# EAGLE board DeviceDIn24 (EAGLE 5.00)
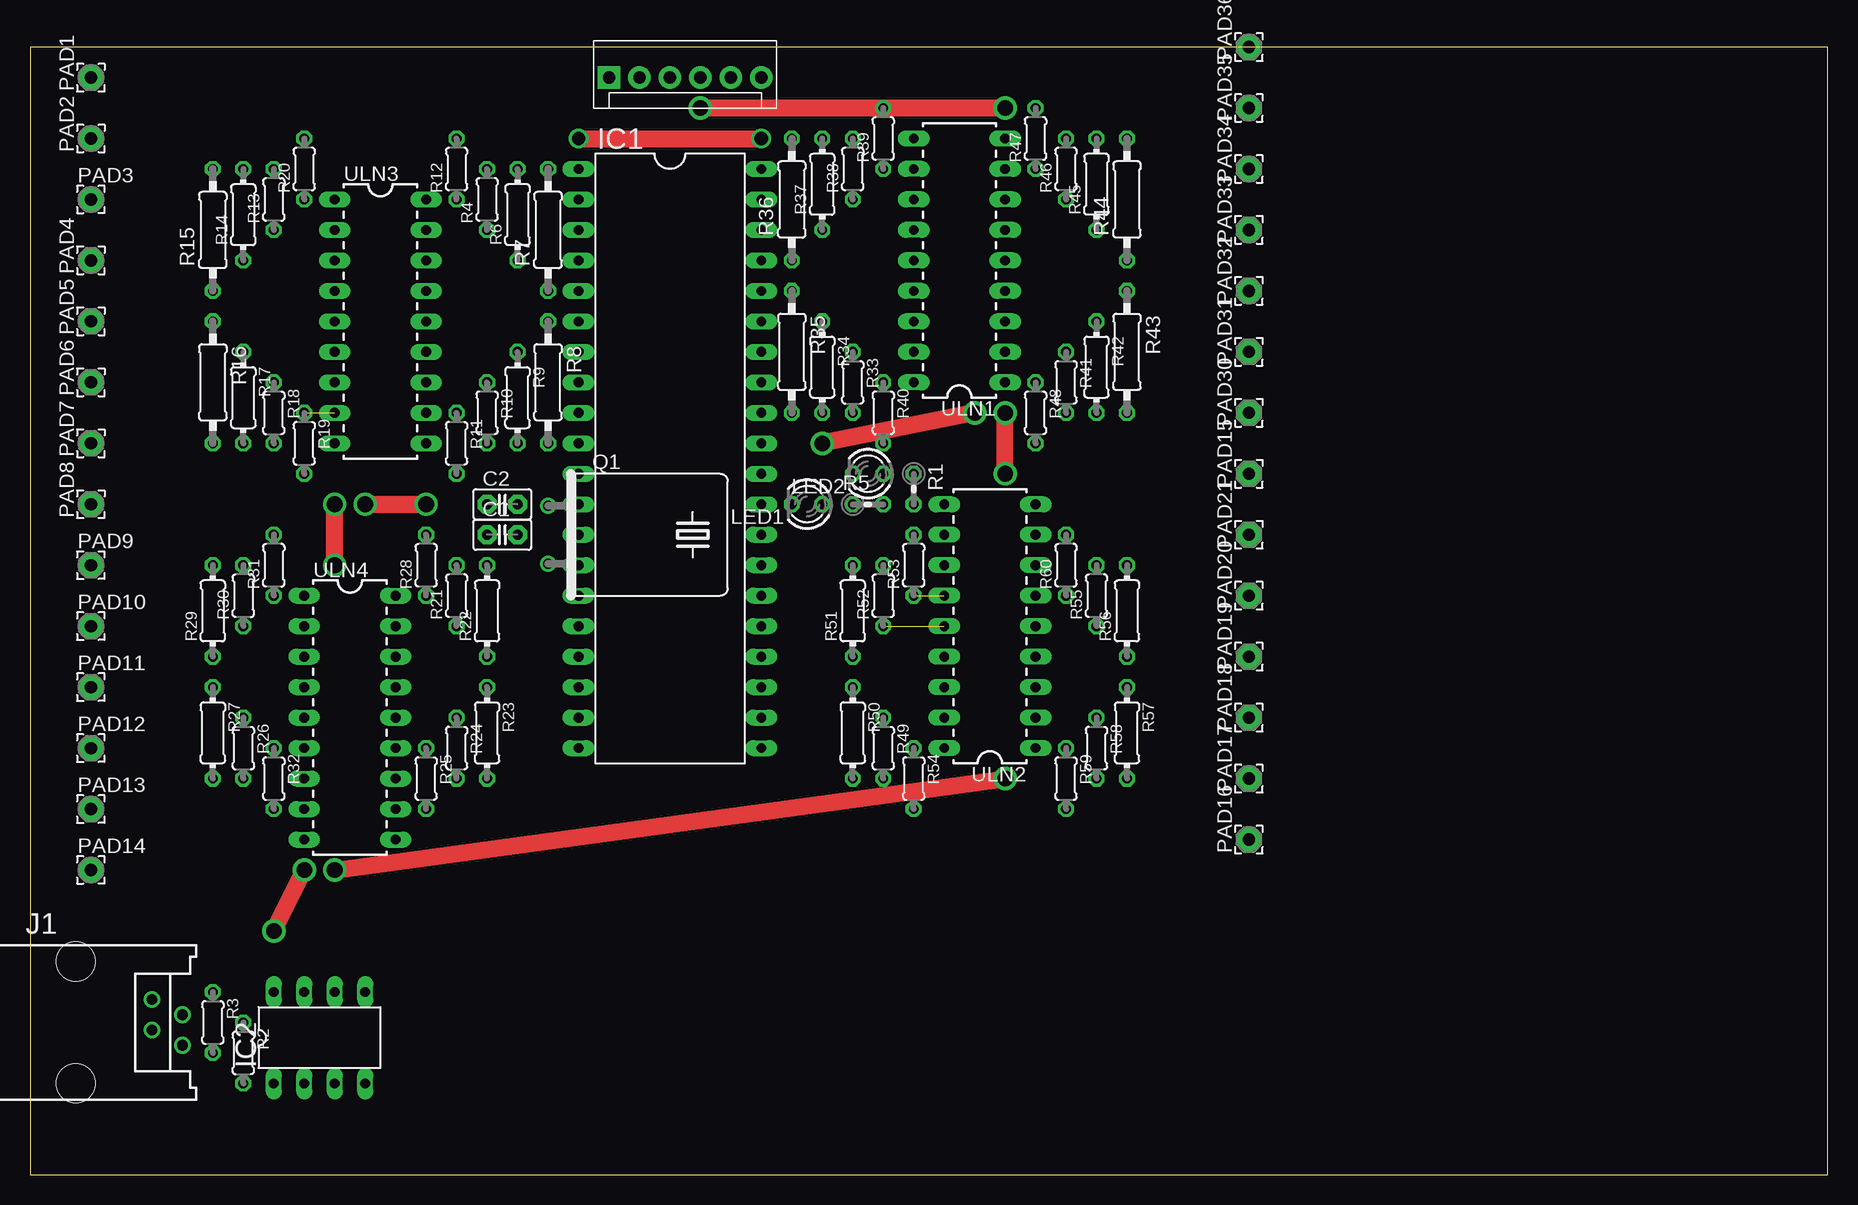
[diagram p0: board, top side]
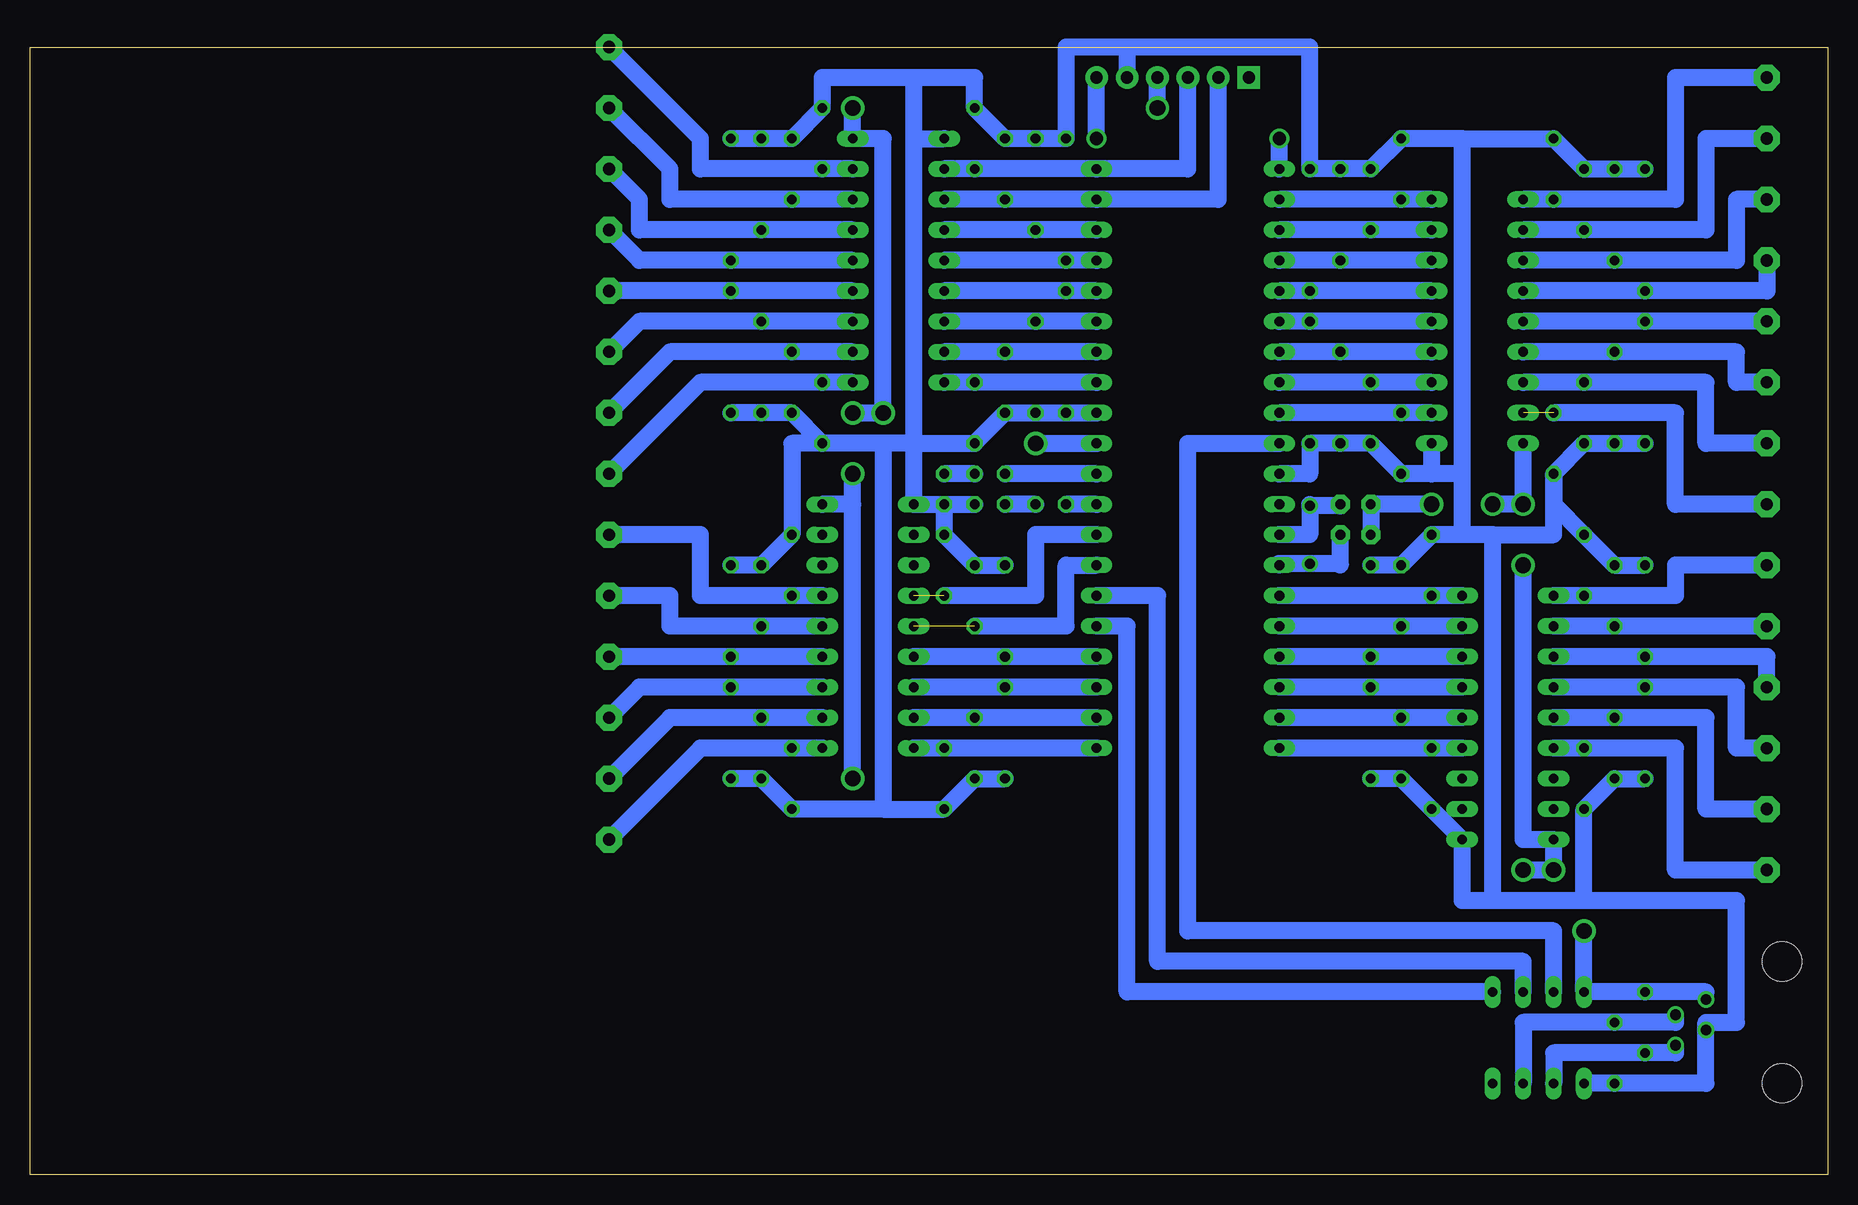
[diagram p1: board, bottom side, seen from below]

Size 149.86 x 93.98 mm. Coordinates in mm from the lower left corner, seen from the top.
Outline: 0,0 149.86,0 149.86,93.98 0,93.98 0,0
Copper layers (1*16): Top 0.035mm / dielectric 1.5mm / Bottom 0.035mm
Design rules "default": minimum track width 10mil, minimum drill 24mil, track to track 8mil, track to pad 8mil, pad to pad 8mil, via to via 8mil, smd to smd 8mil, copper to edge 40mil, drill to drill 8mil, minimum pad ring 10mil, minimum via ring 8mil, stop-mask expansion 4mil, vias tented up to drill 0mil, thermal gap 10mil

## Footprints (pad centres in the part's own frame; a part is rotated, then mirrored left to right if it is on the bottom)
C2.5-2 = drill 0.813 pad 1.6 octagon: 1 -1.27,0; 2 1.27,0
DIL40 = drill 0.813 long: 1 -24.13,-7.62; 2 -21.59,-7.62; 3 -19.05,-7.62; 4 -16.51,-7.62; 5 -13.97,-7.62; 6 -11.43,-7.62; 7 -8.89,-7.62; 8 -6.35,-7.62; 9 -3.81,-7.62; 10 -1.27,-7.62; 11 1.27,-7.62; 12 3.81,-7.62; 13 6.35,-7.62; 14 8.89,-7.62; 15 11.43,-7.62; 16 13.97,-7.62; 17 16.51,-7.62; 18 19.05,-7.62; 19 21.59,-7.62; 20 24.13,-7.62; 21 24.13,7.62; 22 21.59,7.62; 23 19.05,7.62; 24 16.51,7.62; 25 13.97,7.62; 26 11.43,7.62; 27 8.89,7.62; 28 6.35,7.62; 29 3.81,7.62; 30 1.27,7.62; 31 -1.27,7.62; 32 -3.81,7.62; 33 -6.35,7.62; 34 -8.89,7.62; 35 -11.43,7.62; 36 -13.97,7.62; 37 -16.51,7.62; 38 -19.05,7.62; 39 -21.59,7.62; 40 -24.13,7.62
DIL8 = drill 0.813 long: 1 -3.81,-3.81; 2 -1.27,-3.81; 3 1.27,-3.81; 4 3.81,-3.81; 5 3.81,3.81; 6 1.27,3.81; 7 -1.27,3.81; 8 -3.81,3.81
215876-6 = drill 0.889 round: 1 -1.905,6.35; 2 -0.635,8.89; 3 0.635,6.35; 4 1.905,8.89 | hole 3.251: -5.08,0; 5.08,0
LED3MM = drill 0.813 octagon: A -1.27,0; K 1.27,0
2,15/1,0 = drill 1.016 pad 2.159 octagon: 1 0,0
HC49U-H = drill 0.813 round: 1 -2.413,-5.08; 2 2.413,-5.08
0204V = drill 0.813 octagon: 1 -1.27,0; 2 1.27,0
0204/5 = drill 0.813 octagon: 1 -2.54,0; 2 2.54,0
0204/7 = drill 0.813 octagon: 1 -3.81,0; 2 3.81,0
0207/10 = drill 0.813 octagon: 1 -5.08,0; 2 5.08,0
MOLEX-1X6 = drill 1.016 pad 1.88 square: 1 0,0 | drill 1.016 pad 1.88 round: 2 2.54,0; 3 5.08,0; 4 7.62,0; 5 10.16,0; 6 12.7,0
DIL18 = drill 0.813 long: 1 -10.16,-3.81; 2 -7.62,-3.81; 3 -5.08,-3.81; 4 -2.54,-3.81; 5 0,-3.81; 6 2.54,-3.81; 7 5.08,-3.81; 8 7.62,-3.81; 9 10.16,-3.81; 10 10.16,3.81; 11 7.62,3.81; 12 5.08,3.81; 13 2.54,3.81; 14 0,3.81; 15 -2.54,3.81; 16 -5.08,3.81; 17 -7.62,3.81; 18 -10.16,3.81

## Placement (x,y rotation side)
C1  [C2.5-2]  39.37,53.34 0 top
C2  [C2.5-2]  39.37,55.88 0 top
IC1  PIC16F874P  [DIL40]  53.34,59.69 270 top
IC2  PIC12F629P  [DIL8]  24.13,11.43 0 top
J1  [215876-6]  3.81,12.7 270 top
LED1  [LED3MM]  64.77,55.88 180 top
LED2  [LED3MM]  69.85,58.42 180 top
PAD1  [2,15/1,0]  5.08,91.44 90 top
PAD2  [2,15/1,0]  5.08,86.36 90 top
PAD3  [2,15/1,0]  5.08,81.28 0 top
PAD4  [2,15/1,0]  5.08,76.2 90 top
PAD5  [2,15/1,0]  5.08,71.12 90 top
PAD6  [2,15/1,0]  5.08,66.04 90 top
PAD7  [2,15/1,0]  5.08,60.96 90 top
PAD8  [2,15/1,0]  5.08,55.88 90 top
PAD9  [2,15/1,0]  5.08,50.8 0 top
PAD10  [2,15/1,0]  5.08,45.72 0 top
PAD11  [2,15/1,0]  5.08,40.64 0 top
PAD12  [2,15/1,0]  5.08,35.56 0 top
PAD13  [2,15/1,0]  5.08,30.48 0 top
PAD14  [2,15/1,0]  5.08,25.4 0 top
PAD15  [2,15/1,0]  101.6,58.42 90 top
PAD16  [2,15/1,0]  101.6,27.94 90 top
PAD17  [2,15/1,0]  101.6,33.02 90 top
PAD18  [2,15/1,0]  101.6,38.1 90 top
PAD19  [2,15/1,0]  101.6,43.18 90 top
PAD20  [2,15/1,0]  101.6,48.26 90 top
PAD21  [2,15/1,0]  101.6,53.34 90 top
PAD30  [2,15/1,0]  101.6,63.5 90 top
PAD31  [2,15/1,0]  101.6,68.58 90 top
PAD32  [2,15/1,0]  101.6,73.66 90 top
PAD33  [2,15/1,0]  101.6,78.74 90 top
PAD34  [2,15/1,0]  101.6,83.82 90 top
PAD35  [2,15/1,0]  101.6,88.9 90 top
PAD36  [2,15/1,0]  101.6,93.98 90 top
Q1  [HC49U-H]  48.26,53.34 270 top
R1  [0204V]  73.66,57.15 270 top
R2  [0204/5]  17.78,10.16 270 top
R3  [0204/5]  15.24,12.7 270 top
R4  [0204/5]  38.1,81.28 90 top
R5  [0204V]  69.85,55.88 0 top
R6  [0204/7]  40.64,80.01 90 top
R7  [0207/10]  43.18,78.74 90 top
R8  [0207/10]  43.18,66.04 270 top
R9  [0204/7]  40.64,64.77 270 top
R10  [0204/5]  38.1,63.5 270 top
R11  [0204/5]  35.56,60.96 270 top
R12  [0204/5]  35.56,83.82 90 top
R13  [0204/5]  20.32,81.28 90 top
R14  [0204/7]  17.78,80.01 90 top
R15  [0207/10]  15.24,78.74 90 top
R16  [0207/10]  15.24,66.04 270 top
R17  [0204/7]  17.78,64.77 270 top
R18  [0204/5]  20.32,63.5 270 top
R19  [0204/5]  22.86,60.96 270 top
R20  [0204/5]  22.86,83.82 90 top
R21  [0204/5]  35.56,48.26 90 top
R22  [0204/7]  38.1,46.99 90 top
R23  [0204/7]  38.1,36.83 270 top
R24  [0204/5]  35.56,35.56 270 top
R25  [0204/5]  33.02,33.02 270 top
R26  [0204/5]  17.78,35.56 270 top
R27  [0204/7]  15.24,36.83 270 top
R28  [0204/5]  33.02,50.8 90 top
R29  [0204/7]  15.24,46.99 90 top
R30  [0204/5]  17.78,48.26 90 top
R31  [0204/5]  20.32,50.8 90 top
R32  [0204/5]  20.32,33.02 270 top
R33  [0204/5]  68.58,66.04 270 top
R34  [0204/7]  66.04,67.31 270 top
R35  [0207/10]  63.5,68.58 270 top
R36  [0207/10]  63.5,81.28 90 top
R37  [0204/7]  66.04,82.55 90 top
R38  [0204/5]  68.58,83.82 90 top
R39  [0204/5]  71.12,86.36 90 top
R40  [0204/5]  71.12,63.5 270 top
R41  [0204/5]  86.36,66.04 270 top
R42  [0204/7]  88.9,67.31 270 top
R43  [0207/10]  91.44,68.58 270 top
R44  [0207/10]  91.44,81.28 90 top
R45  [0204/7]  88.9,82.55 90 top
R46  [0204/5]  86.36,83.82 90 top
R47  [0204/5]  83.82,86.36 90 top
R48  [0204/5]  83.82,63.5 270 top
R49  [0204/5]  71.12,35.56 270 top
R50  [0204/7]  68.58,36.83 270 top
R51  [0204/7]  68.58,46.99 90 top
R52  [0204/5]  71.12,48.26 90 top
R53  [0204/5]  73.66,50.8 90 top
R54  [0204/5]  73.66,33.02 270 top
R55  [0204/5]  88.9,48.26 90 top
R56  [0204/7]  91.44,46.99 90 top
R57  [0204/7]  91.44,36.83 270 top
R58  [0204/5]  88.9,35.56 270 top
R59  [0204/5]  86.36,33.02 270 top
R60  [0204/5]  86.36,50.8 90 top
U$3  PIC-ICSPPTH  [MOLEX-1X6]  48.26,91.44 0 top
ULN1  [DIL18]  77.47,76.2 90 top
ULN2  [DIL18]  80.01,45.72 90 top
ULN3  [DIL18]  29.21,71.12 270 top
ULN4  [DIL18]  26.67,38.1 270 top

## Library data of the parts
C1 C2 = capacitor-wima
IC1 IC2 = microchip
J1 = con-amp
LED1 LED2 = led
PAD1-PAD21 PAD30-PAD36 = wirepad
Q1 = crystal
R1-R60 = resistor
U$3 ULN1-ULN4 = SparkFun

## Nets
5V: IC1.11 IC1.32 IC2.1 J1.3 R1.2 R2.2 R4.2 R5.2 R6.2 R7.2 R8.2 R9.2 R10.2 R11.2 R12.2 R13.2 R14.2 R15.2 R16.2 R17.2 R18.2 R19.2 R20.2 R21.2 R22.2 R23.2 R24.2 R25.2 R26.2 R27.2 R28.2 R29.2 R30.2 R31.2 R32.2 R33.2 R34.2 R35.2 R36.2 R37.2 R38.2 R39.2 R40.2 R41.2 R42.2 R43.2 R44.2 R45.2 R46.2 R47.2 R48.2 R49.2 R50.2 R51.2 R52.2 R53.2 R54.2 R55.2 R56.2 R57.2 R58.2 R59.2 R60.2 U$3.5 ULN1.10 ULN2.10 ULN3.10 ULN4.10
GND: C1.1 C2.1 IC1.31 IC2.8 J1.1 R3.1 U$3.4 ULN1.9 ULN2.9 ULN3.9 ULN4.9
N$1: IC1.1 U$3.6
N$2: IC1.21 R54.1 ULN2.18
N$3: IC1.2 R12.1 ULN3.18
N$4: IC1.3 R4.1 ULN3.17
N$6: C2.2 IC1.13 Q1.1
N$7: IC1.26 IC2.6
N$8: IC1.4 R6.1 ULN3.16
N$9: IC1.5 R7.1 ULN3.15
N$10: IC1.22 R49.1 ULN2.17
N$11: IC1.6 R8.1 ULN3.14
N$12: IC1.7 R9.1 ULN3.13
N$13: IC1.8 R10.1 ULN3.12
N$14: IC1.9 R11.1 ULN3.11
N$15: IC1.30 LED2.K
N$16: IC1.15 R28.1 ULN4.18
N$17: PAD1.1 R20.1 ULN3.1
N$18: PAD2.1 R13.1 ULN3.2
N$19: PAD3.1 R14.1 ULN3.3
N$20: PAD4.1 R15.1 ULN3.4
N$21: PAD5.1 R16.1 ULN3.5
N$22: PAD6.1 R17.1 ULN3.6
N$23: PAD7.1 R18.1 ULN3.7
N$24: PAD8.1 R19.1 ULN3.8
N$25: IC1.16 R21.1 ULN4.17
N$26: IC1.17 R22.1 ULN4.16
N$27: IC1.18 R23.1 ULN4.15
N$28: IC1.19 R24.1 ULN4.14
N$29: PAD9.1 R31.1 ULN4.1
N$30: IC1.20 R25.1 ULN4.13
N$31: PAD10.1 R30.1 ULN4.2
N$32: PAD11.1 R29.1 ULN4.3
N$33: PAD12.1 R27.1 ULN4.4
N$34: LED2.A R1.1
N$35: LED1.A R5.1
N$36: PAD13.1 R26.1 ULN4.5
N$37: PAD14.1 R32.1 ULN4.6
N$38: C1.2 IC1.14 Q1.2
N$40: IC1.35 R34.1 ULN1.16
N$41: IC1.36 R35.1 ULN1.15
N$42: IC1.37 R36.1 ULN1.14
N$43: IC1.38 R37.1 ULN1.13
N$44: IC1.39 R38.1 U$3.2 ULN1.12
N$45: IC1.40 R39.1 U$3.3 ULN1.11
N$46: PAD15.1 R48.1 ULN1.1
N$47: PAD30.1 R41.1 ULN1.2
N$48: PAD31.1 R42.1 ULN1.3
N$49: PAD32.1 R43.1 ULN1.4
N$50: PAD33.1 R44.1 ULN1.5
N$51: PAD34.1 R45.1 ULN1.6
N$52: PAD35.1 R46.1 ULN1.7
N$53: PAD36.1 R47.1 ULN1.8
N$54: IC1.23 R50.1 ULN2.16
N$55: IC1.24 R51.1 ULN2.15
N$56: IC1.27 R52.1 ULN2.14
N$57: IC1.28 R53.1 ULN2.13
N$58: PAD16.1 R59.1 ULN2.1
N$59: PAD17.1 R58.1 ULN2.2
N$60: PAD18.1 R57.1 ULN2.3
N$61: PAD19.1 R56.1 ULN2.4
N$62: PAD20.1 R55.1 ULN2.5
N$63: PAD21.1 R60.1 ULN2.6
N$64: IC1.34 R33.1 ULN1.17
N$65: IC1.33 R40.1 ULN1.18
N$67: IC1.29 LED1.K
N$68: IC2.3 J1.2 R2.1
N$69: IC2.2 J1.4 R3.2
N$71: IC1.10 IC2.7
N$73: IC1.25 IC2.5
VSS: IC1.12

## Tracks (layer width: path | path; a pad name or v marks a point on that pad's centre or on a via)
5V
  Bottom 1.422: 58.42,93.98 43.18,93.98 R7.2 R6.2 R4.2 R12.2 30.48,86.36 | 58.42,93.98 U$3.5 | 58.42,93.98 63.5,93.98 R36.2 R37.2 R38.2 R39.2 71.12,91.44 76.2,91.44 | 30.48,86.36 R20.2 R13.2 R14.2 R15.2 | R16.2 R17.2 R18.2 R19.2 | R19.2 22.86,55.88 R31.2 R30.2 R29.2 | R27.2 R26.2 R32.2 20.32,22.86 | R22.2 R21.2 R28.2 30.48,53.34 | R23.2 R24.2 R25.2 ULN4.10 30.48,22.86 27.94,22.86 | R19.2 22.86,53.34 27.94,53.34 | R56.2 R55.2 R60.2 86.36,60.96 R48.2 | R57.2 R58.2 R59.2 78.74,30.48 | 78.74,30.48 R54.2 R49.2 R50.2 | 76.2,60.96 78.74,60.96 | 76.2,60.96 ULN2.10 R1.2 | 78.74,60.96 R48.2 | 78.74,60.96 78.74,30.48 | 76.2,60.96 R40.2 R33.2 R34.2 R35.2 IC1.32 | R48.2 R41.2 R42.2 R43.2 | 76.2,91.44 83.82,91.44 R47.2 R46.2 R45.2 R44.2 | 76.2,91.44 76.2,86.36 | 76.2,86.36 76.2,60.96 | IC2.1 R2.2 10.16,7.62 J1.3 10.16,12.7 7.62,12.7 7.62,22.86 20.32,22.86 | 20.32,22.86 27.94,22.86 | R1.2 R5.2 | R1.2 R53.2 R52.2 R51.2 | 76.2,86.36 ULN1.10 | 27.94,53.34 30.48,53.34 | 27.94,22.86 27.94,53.34 | 30.48,53.34 30.48,58.42 | 30.48,58.42 30.48,86.36 | IC1.11 43.18,58.42 R8.2 R9.2 R10.2 R11.2 33.02,58.42 | 30.48,58.42 33.02,58.42 | 33.02,58.42 ULN3.10
GND  (via drill 1.3)
  Top 1.422: v81.28,88.9 v55.88,88.9 | v81.28,58.42 v81.28,63.5 | v78.74,63.5 v66.04,60.96 | v20.32,20.32 v22.86,25.4 | v25.4,50.8 v25.4,55.88 | v27.94,55.88 v33.02,55.88 | v25.4,25.4 v81.28,33.02
  Bottom 1.422: C1.1 C2.1 v33.02,55.88 | J1.1 10.16,15.24 R3.1 IC2.8 v20.32,20.32 | v55.88,88.9 U$3.4 | v81.28,88.9 ULN1.9 78.74,86.36 v78.74,63.5 v81.28,63.5 | 81.28,55.88 v81.28,58.42 | 81.28,55.88 ULN2.9 | v66.04,60.96 IC1.31 | v25.4,50.8 25.4,27.94 ULN4.9 v22.86,25.4 v25.4,25.4 | ULN3.9 v25.4,55.88 v27.94,55.88 | v81.28,33.02 81.28,55.88
N$1  (via drill 1.1)
  Top 1.422: v45.72,86.36 v60.96,86.36
  Bottom 1.422: IC1.1 v45.72,86.36 | v60.96,86.36 U$3.6
N$2
  Bottom 1.422: IC1.21 R54.1 ULN2.18
N$3
  Bottom 1.422: ULN3.18 R12.1 IC1.2
N$4
  Bottom 1.422: IC1.3 R4.1 ULN3.17
N$6
  Bottom 1.422: IC1.13 43.18,53.34 Q1.1 | Q1.1 43.18,55.88 | Q1.1 40.64,55.75 C2.2
N$7
  Bottom 1.422: IC2.6 25.4,17.78 55.88,17.78 55.88,48.26 IC1.26
N$8
  Bottom 1.422: ULN3.16 R6.1 IC1.4
N$9
  Bottom 1.422: IC1.5 R7.1 ULN3.15
N$10
  Bottom 1.422: ULN2.17 R49.1 IC1.22
N$11
  Bottom 1.422: ULN3.14 R8.1 IC1.6
N$12
  Bottom 1.422: IC1.7 R9.1 ULN3.13
N$13
  Bottom 1.422: ULN3.12 R10.1 IC1.8
N$14
  Bottom 1.422: IC1.9 R11.1 ULN3.11
N$15
  Bottom 1.422: IC1.30 LED2.K
N$16
  Bottom 1.422: ULN4.18 R28.1 IC1.15
N$17
  Bottom 1.422: PAD1.1 12.7,91.44 12.7,81.28 R20.1 ULN3.1
N$18
  Bottom 1.422: ULN3.2 R13.1 10.16,78.74 10.16,86.36 PAD2.1
N$19
  Bottom 1.422: ULN3.3 R14.1 7.62,76.2 7.62,81.28 PAD3.1
N$20
  Bottom 1.422: PAD4.1 5.08,73.66 R15.1 ULN3.4
N$21
  Bottom 1.422: ULN3.5 R16.1 PAD5.1
N$22
  Bottom 1.422: PAD6.1 7.62,66.04 7.62,68.58 R17.1 ULN3.6
N$23
  Bottom 1.422: ULN3.7 R18.1 10.16,66.04 10.16,60.96 PAD7.1
N$24  (1 unrouted)
  Bottom 1.422: R19.1 12.7,63.5 12.7,55.88 PAD8.1
N$25
  Bottom 1.422: ULN4.17 R21.1 IC1.16
N$26
  Bottom 1.422: IC1.17 R22.1 ULN4.16
N$27
  Bottom 1.422: IC1.18 R23.1 ULN4.15
N$28
  Bottom 1.422: ULN4.14 R24.1 IC1.19
N$29
  Bottom 1.422: ULN4.1 R31.1 12.7,48.26 12.7,50.8 PAD9.1
N$30
  Bottom 1.422: IC1.20 R25.1 ULN4.13
N$31
  Bottom 1.422: ULN4.2 R30.1 PAD10.1
N$32
  Bottom 1.422: ULN4.3 R29.1 5.08,43.18 PAD11.1
N$33
  Bottom 1.422: ULN4.4 R27.1 7.62,40.64 7.62,35.56 PAD12.1
N$34
  Bottom 1.422: LED2.A R1.1
N$35
  Bottom 1.422: LED1.A R5.1
N$36
  Bottom 1.422: ULN4.5 R26.1 10.16,38.1 10.16,30.48 PAD13.1
N$37
  Bottom 1.422: ULN4.6 R32.1 12.7,35.56 12.7,25.4 PAD14.1
N$38
  Bottom 1.422: 40.64,50.93 Q1.2 45.72,50.93 IC1.14 | 40.64,50.93 40.64,50.8 | 40.64,50.93 C1.2
N$40
  Bottom 1.422: IC1.35 R34.1 ULN1.16
N$41
  Bottom 1.422: IC1.36 R35.1 ULN1.15
N$42
  Bottom 1.422: IC1.37 R36.1 ULN1.14
N$43
  Bottom 1.422: IC1.38 R37.1 ULN1.13
N$44
  Bottom 1.422: U$3.2 50.8,81.28 IC1.39 R38.1 ULN1.12
N$45
  Bottom 1.422: U$3.3 53.34,83.82 IC1.40 R39.1 ULN1.11
N$46
  Bottom 1.422: ULN1.1 R48.1 93.98,66.04 PAD15.1
N$47
  Bottom 1.422: ULN1.2 R41.1 96.52,68.58 PAD30.1
N$48
  Bottom 1.422: ULN1.3 R42.1 99.06,71.12 PAD31.1
N$49
  Bottom 1.422: ULN1.4 R43.1 PAD32.1
N$50
  Bottom 1.422: ULN1.5 R44.1 99.06,76.2 PAD33.1
N$51
  Bottom 1.422: ULN1.6 R45.1 99.06,78.74 99.06,81.28 PAD34.1
N$52
  Bottom 1.422: ULN1.7 R46.1 96.52,81.28 96.52,83.82 PAD35.1
N$53
  Bottom 1.422: ULN1.8 R47.1 93.98,83.82 93.98,86.36 PAD36.1
N$54
  Bottom 1.422: ULN2.16 R50.1 IC1.23
N$55
  Bottom 1.422: ULN2.15 R51.1 IC1.24
N$56  (1 unrouted)
  Bottom 1.422: IC1.27 63.5,50.8 63.5,45.72 R52.1
N$57  (1 unrouted)
  Bottom 1.422: IC1.28 66.04,53.34 66.04,48.26 R53.1
N$58
  Bottom 1.422: ULN2.1 R59.1 93.98,35.56 PAD16.1
N$59
  Bottom 1.422: ULN2.2 R58.1 96.52,38.1 PAD17.1
N$60
  Bottom 1.422: ULN2.3 R57.1 99.06,40.64 PAD18.1
N$61
  Bottom 1.422: ULN2.4 R56.1 PAD19.1
N$62
  Bottom 1.422: ULN2.5 R55.1 96.52,45.72 96.52,48.26 PAD20.1
N$63
  Bottom 1.422: ULN2.6 R60.1 93.98,48.26 93.98,53.34 PAD21.1
N$64
  Bottom 1.422: IC1.34 R33.1 ULN1.17
N$65
  Bottom 1.422: IC1.33 R40.1 ULN1.18
N$67
  Bottom 1.422: IC1.29 LED1.K
N$68
  Bottom 1.422: IC2.3 25.4,12.7 R2.1 12.7,12.7 J1.2
N$69
  Bottom 1.422: IC2.2 22.86,10.16 R3.2 12.7,10.16 J1.4
N$71
  Bottom 1.422: IC2.7 22.86,20.32 53.34,20.32 53.34,60.96 IC1.10
N$73
  Bottom 1.422: IC2.5 58.42,15.24 58.42,45.72 IC1.25